# Allegro board SATROT-2-10.brd
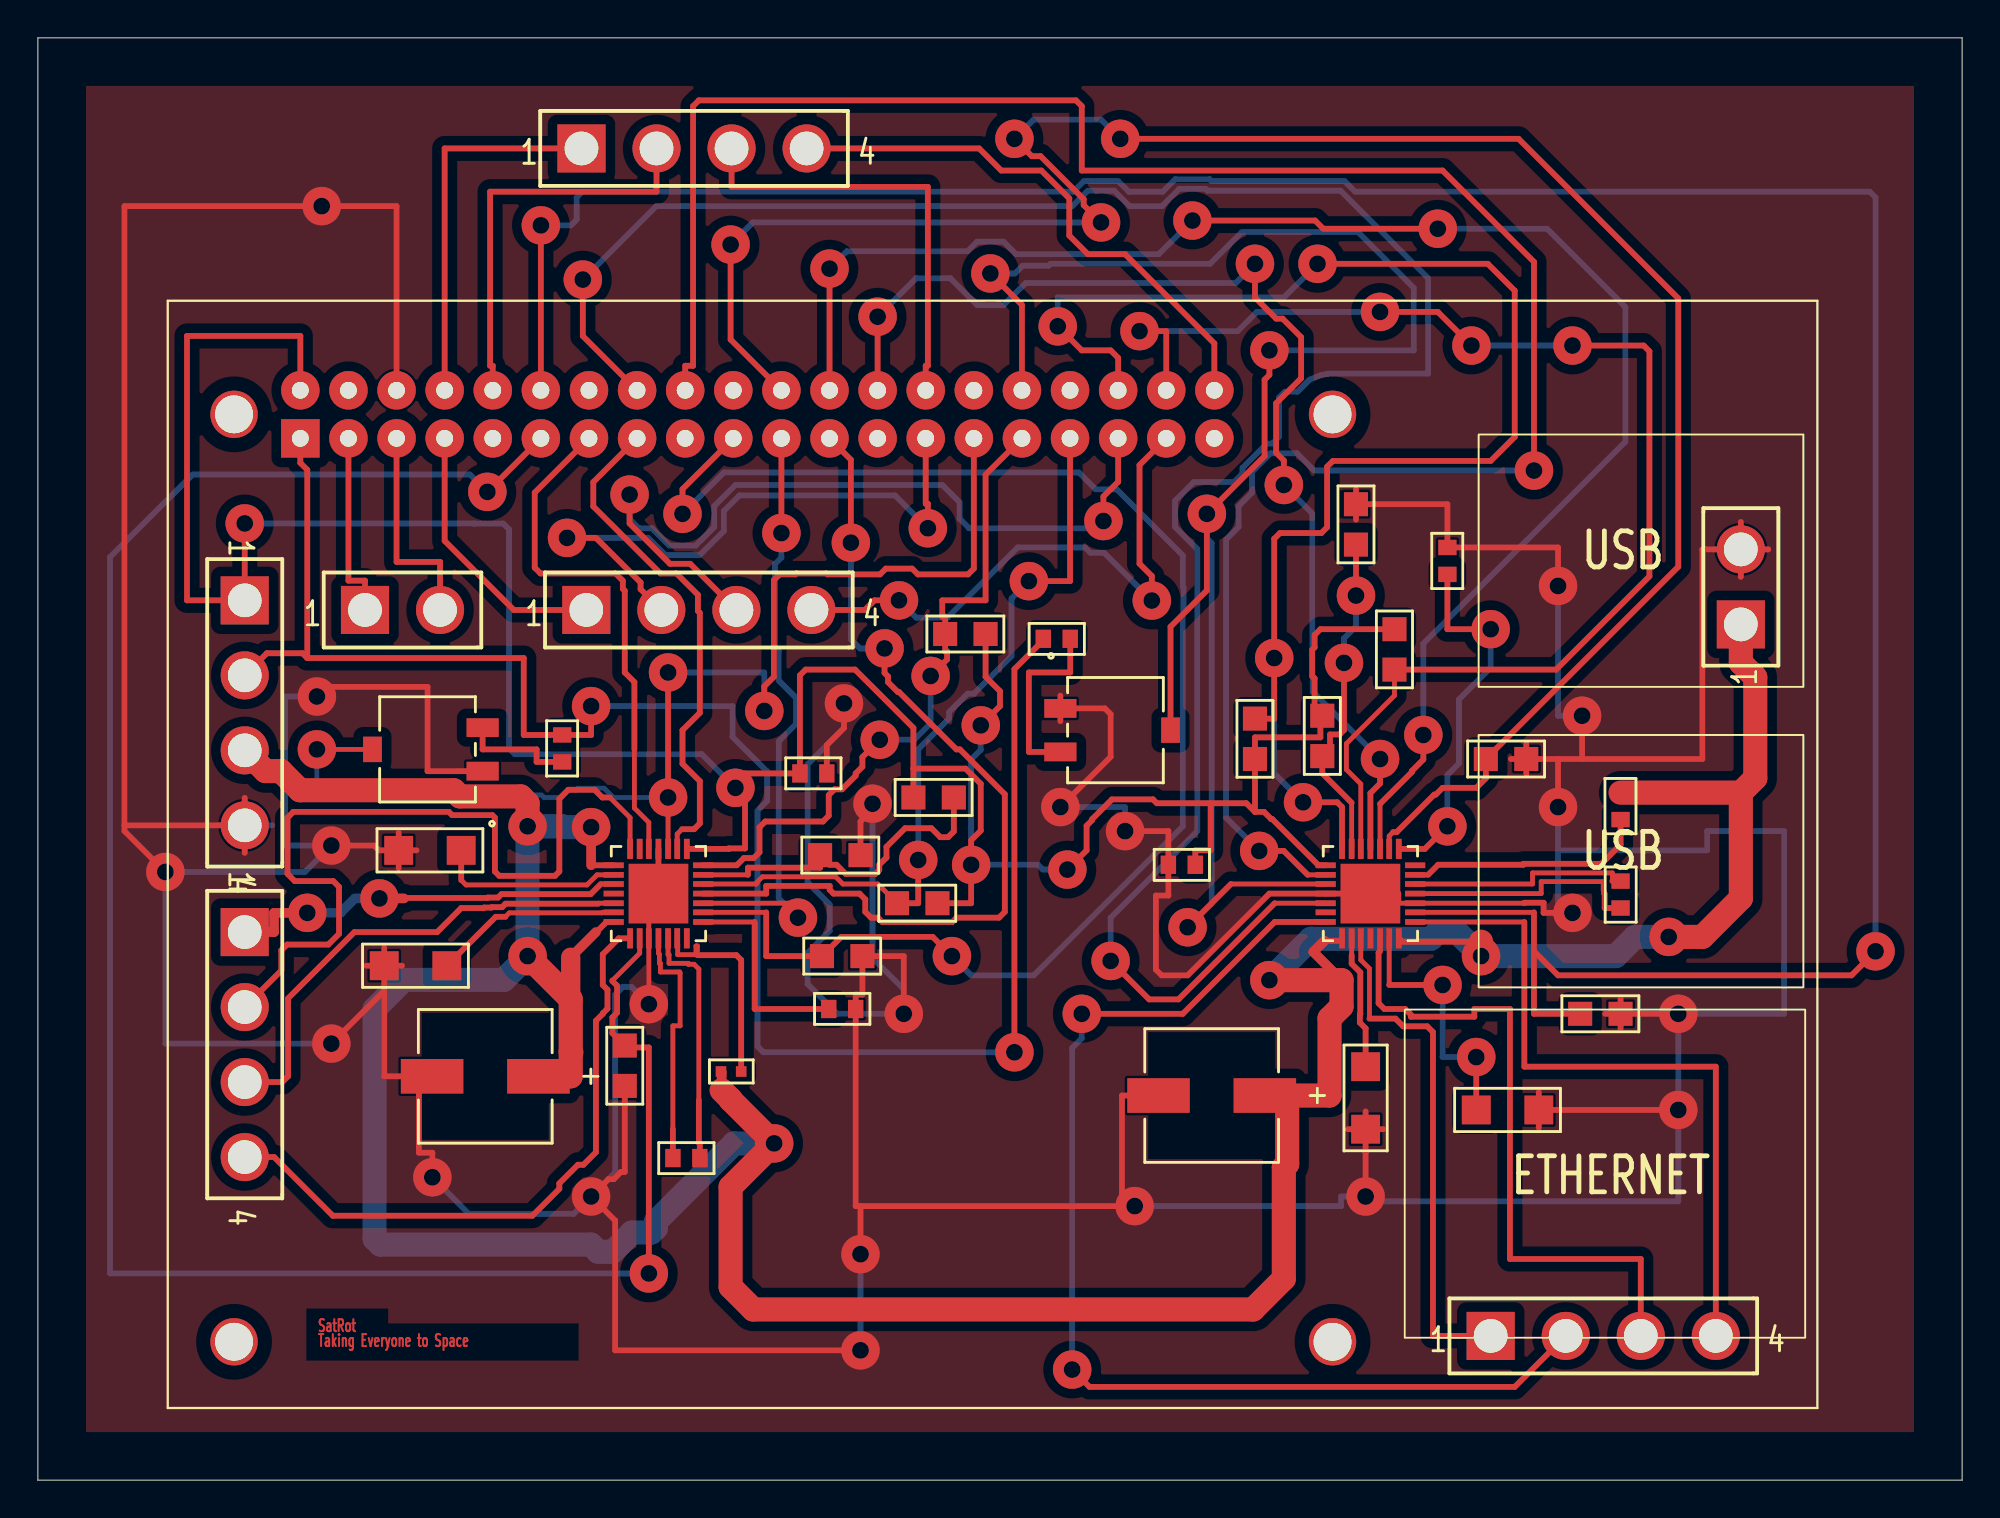
[diagram p0: board, top side]
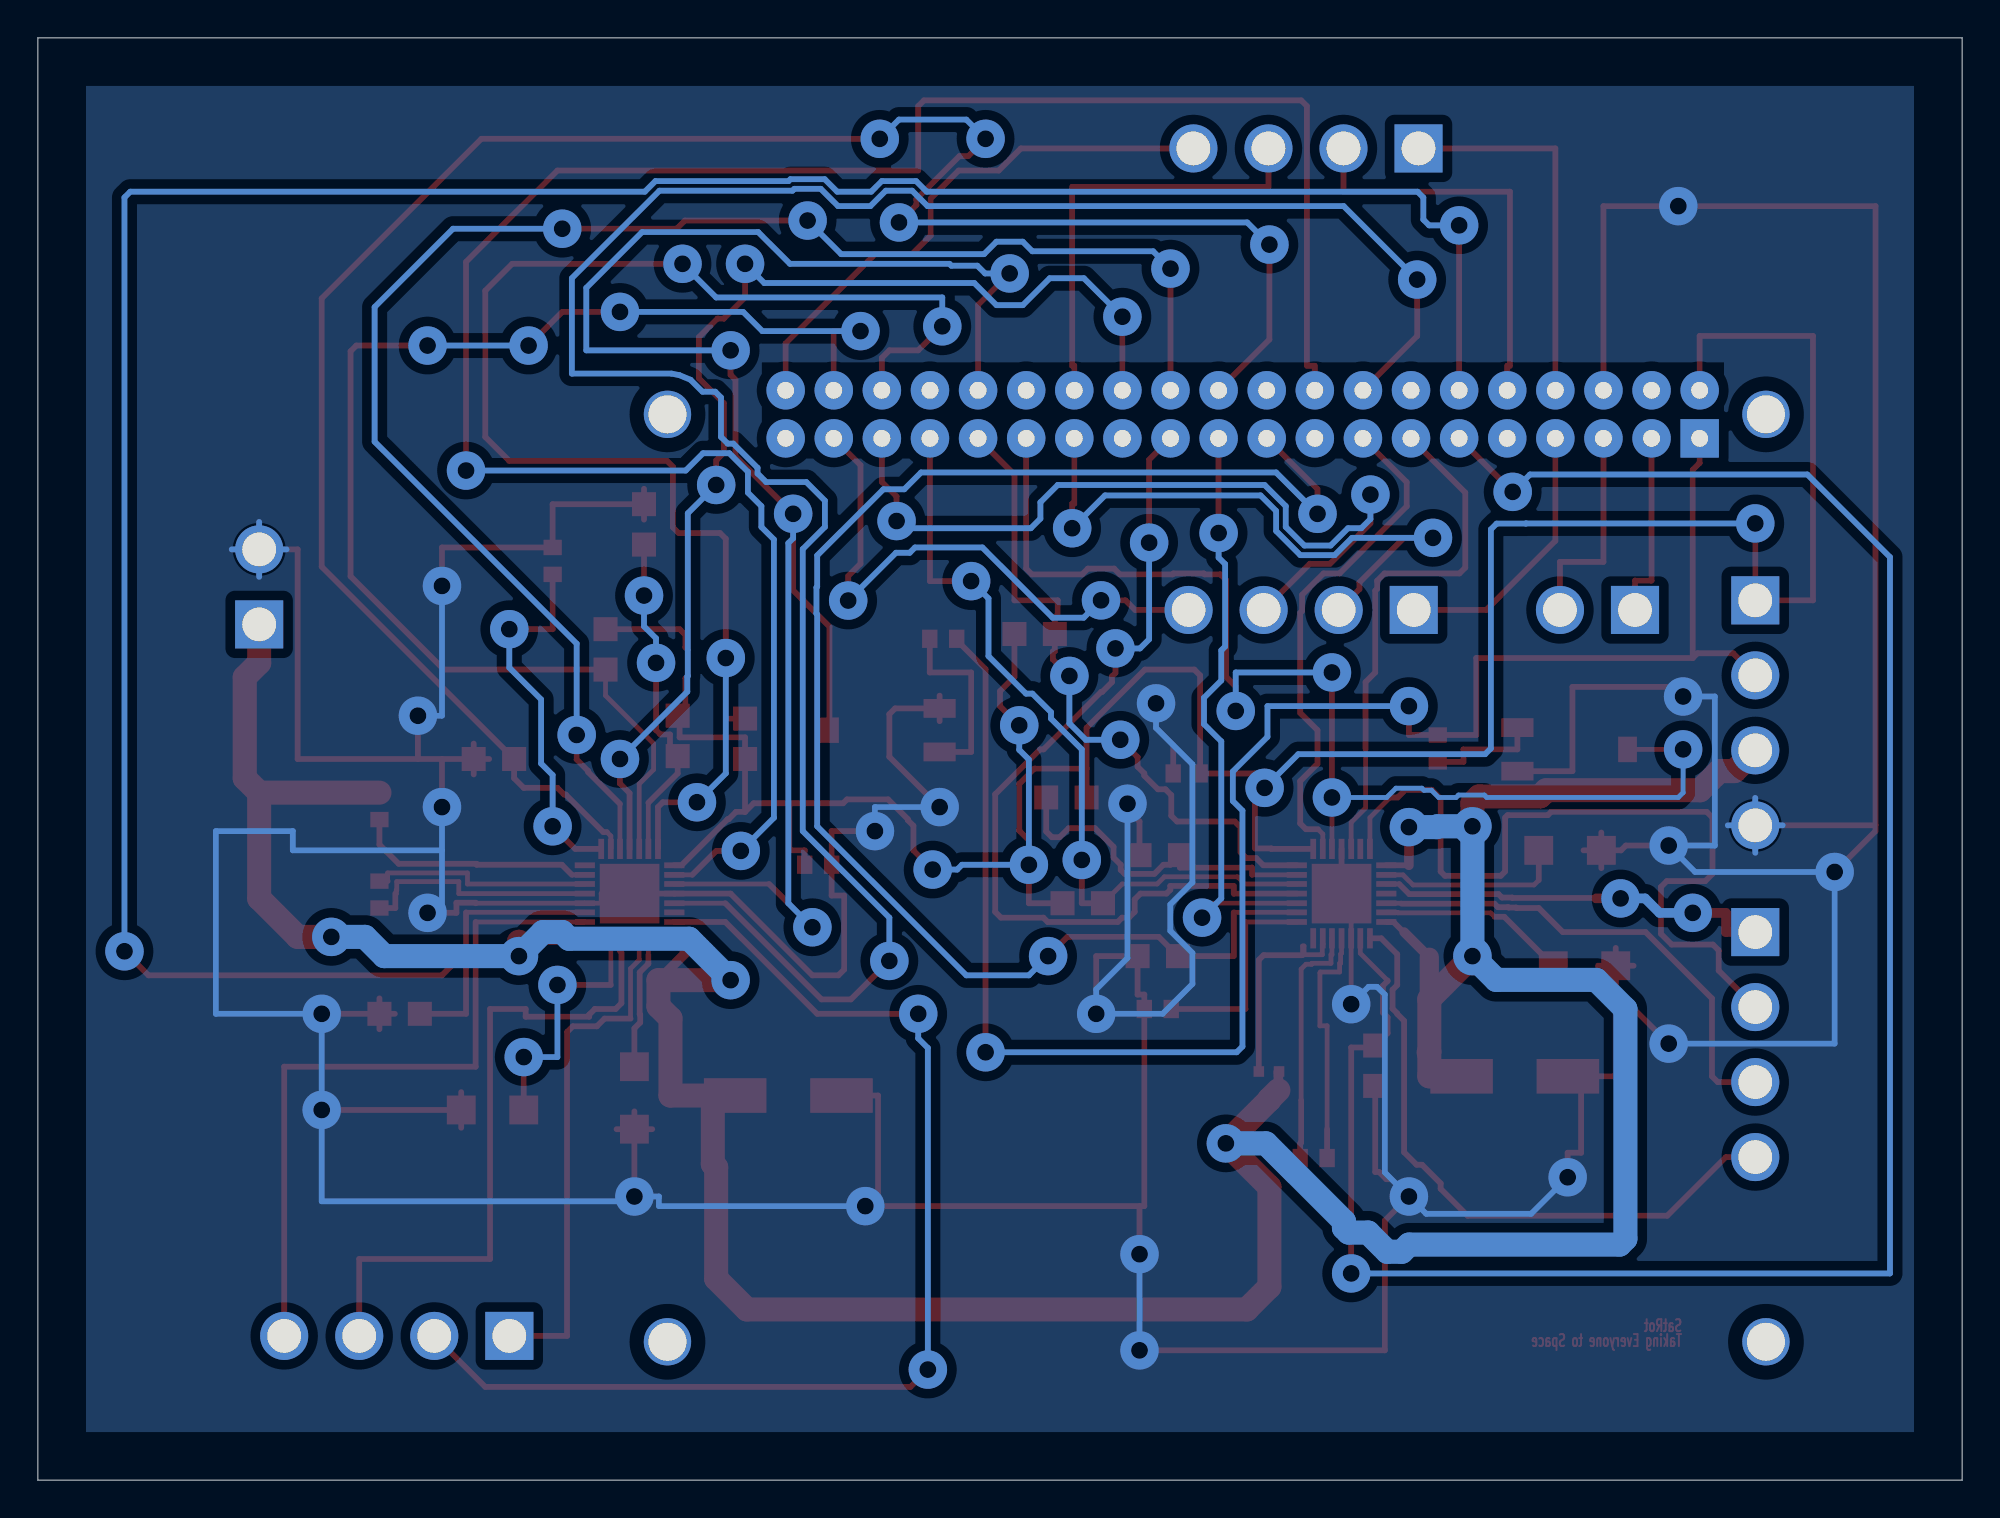
[diagram p1: board, bottom side, seen from below]

Outline 101.6 x 76.2 mm; copper layers: TOP, BOTTOM. Coordinates in mm from the lower left corner of the outline.
Outline path: 0,76.2 101.6,76.2 101.6,0 0,0 0,76.2

## Design rules (mm)
constraint set DEFAULT: min track width 0.305

## Placement (name value [footprint] x y rotation side)
C1  0.1 uF  [SMC0603]  33.53 17.02 0 top
C2  0.22 uF  [SMC0603]  43.18 24.89 180 top
C3  0.1 uF  [SMC0402]  36.07 21.59 0 top
C4  100 uF  [PCAP_SVP_C6-M]  23.62 21.34 180 top
C5  0.22 uF  [SMC0603]  41.66 37.34 180 top
C6  0.1 uF  [SMC0603]  83.57 30.23 90 top
C7  0.22 uF  [SMC0603]  74.42 49.28 270 top
C8  0.1 uF  [SMC0603]  83.57 36.32 270 top
C9  100 uF  [PCAP_SVP_C6-M]  61.98 20.32 180 top
C10  0.22 uF  [SMC0603]  59.69 32.51 0 top
J2  Az Stepper  [BLKCON156VHTM1SQSW1564]  10.92 28.96 270 top
J3  Motor Power  [BLKCON156VHTM1SQSW1562]  89.92 45.21 90 top
J4  Power Connector  [BLKCON156VHTM1SQSW1564]  10.92 46.48 270 top
J5  El Stepper  [BLKCON156VHTM1SQSW1564]  76.71 7.62 0 top
J6  R_PINs  [BLKCON156VHTM1SQSW1564]  28.7 70.36 0 top
J7  L_PINs  [BLKCON156VHTM1SQSW1564]  28.96 45.97 0 top
J8  I2C  [BLKCON156VHTM1SQSW1562]  17.27 45.97 0 top
R1  10K  [SMR0805]  43.43 33.02 180 top
R2  NP  [SMR0805]  46.23 36.07 0 top
R3  100k  [SMR0805]  47.5 30.48 180 top
R4  100k  [SMR0805]  50.04 44.7 180 top
R5  10K POT  [SOT_10KLFTR]  20.57 38.61 90 top
R6  20K  [SMR0603]  27.69 39.37 270 top
R7  NP  [SMR0805]  41.4 27.69 0 top
R8  100k  [SMR0805]  30.99 20.83 90 top
R9  0.05  [SMR1206]  22.35 33.27 180 top
R10  0.05  [SMR1206]  21.59 27.18 180 top
R11  10K  [SMR0805]  69.6 51.56 270 top
R12  NP  [SMR0805]  67.82 40.39 270 top
R13  100k  [SMR0805]  71.63 44.96 270 top
R14  100k  [SMR0805]  64.26 38.1 90 top
R15  10K POT  [SOT_10KLFTR]  56.9 39.62 270 top
R16  20K  [SMR0603]  53.09 44.45 0 top
R17  NP  [SMR0805]  76.45 38.1 0 top
R18  100k  [SMR0805]  83.57 24.64 180 top
R19  0.05  [SMR1206]  70.1 21.84 270 top
R20  0.05  [SMR1206]  75.95 19.56 0 top
U1  A4988SETTR-T  [QFN50P500X500X100-29N]  32.77 30.99 90 top
U2  A4988SETTR-T  [QFN50P500X500X100-29N]  70.36 30.99 180 top
U3  Raspberry Pi B+  [GU-RASP-PI-3]  6.86 3.81 0 top

## Library data of the parts
C1-C3 C5-C8 C10 = CAP NP
C4 C9 = CAP POL: User Part Number: PN; Tolerance: TOL
J2 J4-J7 = 4 HEADER
J3 = CON2
J8 = HEADER 2
R1-R4 R6-R14 R16-R20 = R
R5 R15 = 23BR10KLFTR: User Part Number: PN; Tolerance: TOL
U1 U2 = A4988SETTR-T
U3 = Raspberry Pi B+

## Footprints (pads in the part's own frame, mm; a bottom-side part is the same pattern mirrored in y, then rotated)
BLKCON156VHTM1SQSW1562
  rect 2.54x2.54 hole 1.778: 1(0,0)
  round 2.54 hole 1.778: 2(3.962,0)
BLKCON156VHTM1SQSW1564
  rect 2.54x2.54 hole 1.778: 1(0,0)
  round 2.54 hole 1.778: 2(3.962,0) 3(7.925,0) 4(11.887,0)
GU-RASP-PI-3
  round 2.5 hole 2 unplated: (3.5,52.5) (3.5,3.5) (61.5,52.5) (61.5,3.5)
  rect 2.032x2.032 hole 0.889: 1(7,51.23)
  round 2.032 hole 0.889: 2(7,53.77) 3(9.54,51.23) 4(9.54,53.77) 5(12.08,51.23) 6(12.08,53.77) 7(14.62,51.23) 8(14.62,53.77) 9(17.16,51.23) 10(17.16,53.77) 11(19.7,51.23) 12(19.7,53.77) 13(22.24,51.23) 14(22.24,53.77) 15(24.78,51.23) 16(24.78,53.77) 17(27.32,51.23) 18(27.32,53.77) 19(29.86,51.23) 20(29.86,53.77) 21(32.4,51.23) 22(32.4,53.77) 23(34.94,51.23) 24(34.94,53.77) 25(37.48,51.23) 26(37.48,53.77) 27(40.02,51.23) 28(40.02,53.77) 29(42.56,51.23) 30(42.56,53.77) 31(45.1,51.23) 32(45.1,53.77) 33(47.64,51.23) 34(47.64,53.77) 35(50.18,51.23) 36(50.18,53.77) 37(52.72,51.23) 38(52.72,53.77) 39(55.26,51.23) 40(55.26,53.77)
PCAP_SVP_C6-M
  rect 3.302x1.829 smd: 1(-2.807,0) 2(2.807,0)
QFN50P500X500X100-29N
  rect 1.067x0.305 smd: 1(-2.362,1.499) 2(-2.362,0.991) 3(-2.362,0.508) 4(-2.362,0) 5(-2.362,-0.508) 6(-2.362,-0.991) 7(-2.362,-1.499) 15(2.362,-1.499) 16(2.362,-0.991) 17(2.362,-0.508) 18(2.362,0) 19(2.362,0.508) 20(2.362,0.991) 21(2.362,1.499)
  rect 0.305x1.067 smd: 8(-1.499,-2.362) 9(-0.991,-2.362) 10(-0.508,-2.362) 11(0,-2.362) 12(0.508,-2.362) 13(0.991,-2.362) 14(1.499,-2.362) 22(1.499,2.362) 23(0.991,2.362) 24(0.508,2.362) 25(0,2.362) 26(-0.508,2.362) 27(-0.991,2.362) 28(-1.499,2.362)
  rect 3.15x3.15 smd: 29(0,0)
SMC0402
  rect 0.559x0.559 smd: 1(0,0) 2(1.067,0)
SMC0603
  rect 0.813x0.965 smd: 1(0,0) 2(1.422,0)
SMR0603
  rect 0.813x0.965 smd: 1(0,0) 2(1.422,0)
SMR0805
  rect 1.27x1.27 smd: 1(0,0) 2(2.134,0)
SMR1206
  rect 1.524x1.524 smd: 1(0,0) 2(3.302,0)
SOT_10KLFTR
  rect 0.991x1.702 smd: 1(-1.15,-2.908) 3(1.15,-2.908)
  rect 1.346x0.991 smd: 2(0,2.908)

## Nets
3V3: J4.2 R6.1 R16.1 U3.1
GND: C2.1 C4.2 C5.1 C7.1 C9.2 C10.1 J3.2 J4.4 R1.1 R5.1 R7.2 R8.1 R9.2 R10.2 R11.1 R15.1 R17.2 R18.1 R19.2 R20.2 U1.3 U1.18 U1.29 U2.3 U2.18 U2.29 U3.6
GND3: U3.14
GND4: U3.20
GND5: U3.25
GND6: U3.30
GND7: U3.34
GND8: U3.39
P3V3: U3.17
P5V: U3.4(P5V#4)
VDD: C5.2 C10.2 J4.1 R2.1 R3.1 R4.1 R12.1 R13.1 R14.1 U1.15 U2.15 U3.2
7/GPIO: J7.1 U3.7
19/GPIO: J7.3 U3.35
27/RESERVED: J7.2 U3.27
28/RESERVED: J6.3 U3.28
37/GPIO: J7.4 U3.37
GPIO: J6.4 U3.40
GPIO/RX: J6.2 U3.10
GPIO/TX: J6.1 U3.8
VMM: C3.1 C4.1 C8.1 C9.1 J3.1 J4.3 U1.22 U1.28 U2.22 U2.28
N00486: J2.1 U1.24
N00488: J2.2 U1.21
N00490: J2.3 U1.26
N00492: J2.4 U1.1
N00665: R1.2 R2.2 U1.13
N00675: R3.2 U1.12 U3.33
N00682: R4.2 U1.14(~SLEEP) U3.31
N00813: R5.3 R6.2
N01051: R5.2 U1.17 U3.29
N01158: R8.2 U1.2 U3.11
N01167: R7.1 U1.9 U3.19
N01261: R10.1 U1.27
N01273: R9.1 U1.23
N01454: C1.1 U1.4
N01461: C1.2 U1.5
N01528: C2.2 U1.8
N01594: C3.2 U1.6
N04587: J5.1 U2.24
N04591: J5.2 U2.21
N04595: J5.3 U2.26
N04599: J5.4 U2.1
N04699: R11.2 R12.2 U2.13
N04707: R13.2 U2.12 U3.38
N04715: R14.2 U2.14(~SLEEP) U3.36
N04789: R15.2 U2.17 U3.32
N04853: R18.2 U2.2 U3.12
N04861: R17.1 U2.9 U3.22
N04909: R20.1 U2.27
N04921: R19.1 U2.23
N04961: C6.1 U2.4
N04969: C6.2 U2.5
N04997: C7.2 U2.8
N05017: C8.2 U2.6
N05607: U1.19 U3.13
N05619: U1.16 U3.15
N05647: U1.10 U3.21
N05659: U1.11 U3.23
N05690: U2.19 U3.16
N05705: U2.16 U3.18
N05729: U2.10 U3.24
N05742: U2.11 U3.26
N09636: J8.1 U3.3
N09640: J8.2 U3.5
N53390: R15.3 R16.2

Pads without a net: U1 7 20 25; U2 7 20 25; U3 9

## Via types
v1: diameter 2.032, hole 0.889, TOP to BOTTOM, 99 vias

## Routing (per net, layer and track width the routed paths; a pad name or vN(x,y) marks a point on that pad's centre or on a via; arc(x,y) is an arc through that point)
3V3: length 98.8
  TOP w0.305: R16.1 53.09,44.37 51.56,42.85 v1(51.56,22.61) ; 14.22,43.43 14.22,53.38 13.86,53.74 U3.1 ; 14.22,43.43 25.65,43.43 25.65,39.37 R6.1 29.21,39.37 v1(29.21,40.89) ; 14.22,43.43 13.97,43.69 12.09,43.69 J4.2
  BOTTOM w0.305: v1(29.21,40.89) 36.68,40.89 36.68,39.27 38.51,37.44 38.51,35.88 38,35.37 38,22.91 38.3,22.61 v1(51.56,22.61)
GND: length 515.4
  TOP w0.254: 71.83,30.48 U2.3 78.49,30.48 ; 32.26,29.51 U1.3 v1(32.26,25.15)
  TOP w0.305: v1(15.49,33.53) 17.75,33.53 18.01,33.27 R9.2 ; 57.24,14.48 57.24,20.32 C9.2 ; 57.24,14.48 v1(57.91,14.48) ; 57.24,14.48 43.43,14.48 ; v1(81.53,40.39) 81.53,38.1 ; 81.53,38.1 80.26,38.1 ; 81.53,38.1 87.88,38.1 87.88,49.17 J3.2 ; 10.92,33.15 J4.4 ; J4.4 4.57,34.59 ; J4.4 10.92,36.04 ; R10.2 19.23,27.18 ; R10.2 17.35,27.18 ; R10.2 18.29,25.86 ; R10.2 18.29,28.12 ; 77.77,38.1 R17.2 ; R17.2 78.59,38.91 ; R17.2 78.59,37.29 ; R17.2 80.26,38.1 ; 78.49,30.48 78.49,30.51 79.5,30.51 79.5,29.97 v1(81.03,29.97) ; R19.2 71.04,18.54 ; R19.2 v1(70.1,14.99) ; R19.2 70.1,19.48 ; R19.2 69.16,18.54 ; 19.05,32.33 R9.2 ; R9.2 19.99,33.27 ; R9.2 19.05,34.21 ; 4.57,34.59 4.57,34.29 v1(6.73,32.13) ; 4.57,34.59 4.57,67.31 v1(14.99,67.31) 18.94,67.31 U3.6 ; J3.2 91.36,49.17 ; J3.2 89.92,47.73 ; J3.2 89.92,50.62 ; R15.1 53.99,41.45 ; R15.1 53.99,40.1 ; R15.1 56.34,40.77 56.64,40.47 56.64,38.21 v1(53.99,35.56) ; 83.57,23.82 R18.1 ; R18.1 82.75,24.64 ; R18.1 83.57,25.45 ; R18.1 v1(86.61,24.64) ; v1(20.83,16) 20.83,17.3 20.12,17.3 20.12,21.34 ; v1(14.73,41.4) 14.73,41.91 20.57,41.91 20.57,37.46 R5.1 ; 79.25,18.62 R20.2 ; R20.2 79.25,20.5 ; R20.2 v1(86.61,19.56) ; v1(43.43,11.94) 43.43,14.48 ; 43.43,14.48 43.18,14.48 C2.1 43.18,25.65 43.54,25.65 R7.2 45.72,27.69 v1(45.72,24.64) ; v1(80.26,47.24) 80.26,49.28 C7.1 74.42,51.56 R11.1 ; 71.83,30.48 71.83,30.99 U2.29 U2.18 65.02,30.99 60.71,26.67 59.33,26.67 59.03,26.97 59.03,30.89 59.69,30.89 C10.1 59.69,34.29 v1(57.4,34.29) ; 18.29,25.86 18.29,21.34 20.12,21.34 ; 18.29,25.86 v1(15.49,23.06) ; 80.26,38.1 v1(80.26,35.56) ; R11.1 69.6,50.75 ; R11.1 69.6,52.38 ; U1.18 U1.29 32.77,30.02 32.26,29.51 ; 20.12,21.34 C4.2 ; R1.1 43.43,34.8 44.07,35.43 v1(44.07,35.74) ; v1(43.43,6.86) 30.48,6.86 30.48,13.72 v1(29.21,14.99) 30.13,15.9 30.41,15.9 30.78,16.28 30.99,16.28 R8.1 ; C5.1 41.66,38.84 42.56,39.74 v1(42.56,41.04)
  BOTTOM w0.305: v1(15.49,23.06) 6.73,23.06 v1(6.73,32.13) 14.1,32.13 v1(15.49,33.53) 13.06,33.53 13.06,41.4 v1(14.73,41.4) ; v1(80.26,47.24) 80.26,40.39 v1(81.53,40.39) ; v1(43.43,6.86) v1(43.43,11.94) ; J3.2 89.92,50.62 ; J3.2 91.36,49.17 ; J3.2 88.47,49.17 ; J3.2 89.92,47.73 ; v1(57.91,14.48) 68.81,14.48 68.81,14.99 v1(70.1,14.99) 70.1,14.73 86.61,14.73 v1(86.61,19.56) v1(86.61,24.64) 92.2,24.64 92.2,34.29 88.14,34.29 88.14,33.27 80.26,33.27 ; v1(44.07,35.74) 44.07,27.58 45.72,25.93 v1(45.72,24.64) 42.21,24.64 40.64,26.21 40.64,27.85 41.81,29.02 41.81,30.41 40.64,31.58 40.64,37.82 42.56,39.74 v1(42.56,41.04) ; 80.26,33.27 80.26,29.97 v1(81.03,29.97) ; 80.26,33.27 v1(80.26,35.56) ; v1(32.26,25.15) 31.34,26.06 30.89,26.06 30.48,25.65 30.48,16.26 v1(29.21,14.99) 28.29,14.07 22.76,14.07 v1(20.83,16) ; J4.4 10.92,36.04 ; J4.4 9.47,34.59 ; J4.4 12.37,34.59 ; J4.4 10.92,33.15 ; v1(57.4,34.29) 57.4,35.56 v1(53.99,35.56)
VDD: length 164.6
  TOP w0.305: 64.26,35.31 R14.1 64.26,39.24 67.72,39.24 67.72,40.39 ; 64.26,35.31 64.74,35.31 65.13,34.92 65.18,34.92 67.61,32.49 U2.15 ; 64.26,35.31 63.8,35.76 61.92,35.76 ; 37.34,36.58 37.34,33.38 36.47,33.38 36.47,33.35 U1.15 ; 37.34,36.58 v1(36.83,36.58) ; 37.34,36.58 37.34,37.34 C5.2 40.23,42.52 40.54,42.82 43.15,42.82 46.23,39.74 46.23,37.59 ; 61.92,35.76 59.08,35.76 58.88,35.97 56.71,35.97 55.66,34.92 55.66,34.87 55.37,34.57 55.37,33.27 v1(54.36,32.26) ; 61.92,35.76 61.92,33.27 61.11,33.27 C10.2 ; R12.1 67.72,40.39 ; 67.72,40.39 67.41,40.69 67.41,42.36 67.28,42.49 67.28,43.87 67.41,44 67.41,44.65 67.72,44.96 R13.1 ; U3.2 13.86,60.45 7.87,60.45 7.87,46.48 J4.1 v1(10.92,50.55) ; R4.1 50.04,42.44 50.8,41.68 50.8,40.89 v1(49.78,39.88) ; 46.23,37.59 R2.1 ; 46.23,37.59 48.98,37.59 49.78,36.79 49.78,34.32 49.28,33.81 v1(49.28,32.51) 49.28,30.48 R3.1
  BOTTOM w0.305: v1(36.83,36.58) 35.05,38.35 25.19,38.35 24.88,38.66 24.88,50.23 24.58,50.54 23.04,50.54 23.03,50.55 v1(10.92,50.55) ; v1(54.36,32.26) 53.06,32.26 52.81,32.51 v1(49.28,32.51) 49.28,38.07 49.78,38.58 v1(49.78,39.88)
7/GPIO: length 14.4
  TOP w0.305: J7.1 25.13,45.97 21.48,49.63 U3.7
19/GPIO: length 44.2
  TOP w0.305: v1(31.24,52.07) 31.24,50.55 33.38,48.41 34.44,48.41 J7.3 ; U3.35 57.04,52.75 56.26,51.97 v1(56.26,50.67)
  BOTTOM w0.305: v1(31.24,52.07) 31.24,50.77 31.72,50.29 32.43,50.29 33.34,49.38 34.73,49.38 35.71,50.36 35.71,51.46 36.83,52.58 47.75,52.58 48.67,51.66 48.67,50.8 49.17,50.29 55.88,50.29 v1(56.26,50.67)
27/RESERVED: length 33.7
  TOP w0.305: U3.27 46.88,51.59 46.99,51.59 v1(46.99,50.29) ; v1(27.94,49.78) 29.46,49.78 31.82,47.43 31.82,47.07 J7.2
  BOTTOM w0.305: v1(46.99,50.29) 45.26,52.02 37.04,52.02 36.22,51.21 36.22,50.15 34.94,48.87 33.13,48.87 32.22,49.78 v1(27.94,49.78)
28/RESERVED: length 23.3
  TOP w0.305: U3.28 46.88,58.88 46.99,58.88 46.99,68.33 36.63,68.33 J6.3
37/GPIO: length 30.7
  TOP w0.305: U3.37 58.17,53.63 58.17,48.42 58.82,47.77 v1(58.82,46.47) ; J7.4 43.66,45.97 44.17,46.48 v1(45.47,46.48)
  BOTTOM w0.305: v1(58.82,46.47) 56.29,49 55.57,49 55.29,49.28 51.73,49.28 48.02,45.57 46.38,45.57 v1(45.47,46.48)
GPIO: length 29.4
  TOP w0.305: J6.4 49.7,70.36 50.87,69.19 52.98,69.19 54.46,67.72 54.46,65.75 55.44,64.77 57.4,64.77 62.12,60.06 U3.40
GPIO/RX: length 21.7
  TOP w0.305: J6.2 32.66,68.07 23.88,68.07 23.88,58.88 24.02,58.88 U3.10
GPIO/TX: length 20
  TOP w0.305: U3.8 21.48,70.36 J6.1
VMM: length 216.4
  TOP w0.305: U1.22 29.21,32.49 ; U2.28 72.03,28.45 76.2,28.45 ; U1.28 30.02,29.49 29.49,28.96 29.46,28.96 ; U2.22 68.86,28.5 67.93,28.5
  TOP w0.508: 36.1,20.6 36.1,21.56 C3.1 ; 29.46,28.96 28.13,27.63 ; 29.21,32.49 v1(29.21,34.5) ; 68.83,26.42 67.34,27.91 67.93,28.5
  TOP w1.016: 28.13,27.63 28.13,25.41
  TOP w1.27: 65.96,20.32 65.48,20.32 ; 65.96,20.32 65.96,16.7 65.79,16.53 65.79,10.64 64.16,9.02 37.77,9.02 36.58,10.21 36.58,15.49 v1(38.87,17.79) 36.58,20.09 36.58,20.12 36.1,20.6 ; 65.96,20.32 68.2,20.32 68.2,24.4 68.83,25.03 68.83,26.42 v1(65.02,26.42) ; 65.48,20.32 C9.1 ; 65.48,20.32 65.48,20.1 ; J3.1 89.92,43.18 90.68,42.42 90.68,37.08 89.92,36.32 ; 27.13,21.56 27.13,21.34 ; 27.13,21.34 C4.1 ; 27.13,21.34 28.13,21.34 28.13,22.63 ; 89.92,36.32 89.92,30.73 87.88,28.7 v1(86.11,28.7) ; 89.92,36.32 C8.1 ; v1(25.86,34.54) 25.86,35.76 25.5,36.12 22.28,36.12 21.96,36.45 13.84,36.45 12.82,37.46 12.02,37.46 J4.3 ; 28.13,22.63 28.17,22.6 ; 28.13,22.63 28.13,25.41 v1(25.86,27.69) ; v1(76.2,27.69) 76.2,28.45
  BOTTOM w1.27: v1(65.02,26.42) 67.21,28.6 73.55,28.6 73.91,28.96 74.93,28.96 v1(76.2,27.69) 83.31,27.69 84.33,28.7 v1(86.11,28.7) ; v1(29.21,34.5) 27.76,34.5 27.71,34.54 v1(25.86,34.54) v1(25.86,27.69) 24.6,26.43 19.32,26.43 17.78,24.89 17.78,12.75 18.08,12.45 29.2,12.45 29.59,12.06 30.35,12.06 31.36,13.08 32.39,13.08 32.64,13.33 32.64,13.67 36.76,17.79 v1(38.87,17.79)
N00486: length 21.1
  TOP w0.254: 29.72,31.5 U1.24
  TOP w0.305: 29.72,31.5 29.19,30.96 24.48,30.96 24.3,30.78 23.75,30.78 23.73,30.76 19.35,30.76 19.33,30.73
  TOP w0.508: J2.1 12.47,28.96 12.47,29.97 v1(14.22,29.97) ; v1(18.03,30.73) 19.33,30.73
  BOTTOM w0.508: v1(18.03,30.73) 16.74,30.73 15.98,29.97 v1(14.22,29.97)
N00488: length 43.3
  TOP w0.254: 30.2,36.07 31.27,35 U1.21
  TOP w0.305: 30.2,36.07 29.8,36.07 29.4,36.47 28.01,36.47 27.53,36 27.53,32.16 27.3,31.93 24.36,31.93 24.13,32.16 24.13,35 24,35.13 21.87,35.13 21.7,35.31 13.49,35.31 13.18,35 13.18,32.03 13.56,31.65 15.6,31.65 15.9,31.34 15.9,28.86 15.33,28.3 13.16,28.3 12.85,27.99 12.85,26.92 J2.2
N00490: length 25.8
  TOP w0.254: 29.59,30.45 29.62,30.48 U1.26
  TOP w0.305: J2.3 12.9,21.03 13.21,21.34 13.21,25.45 16.71,28.96 21.08,28.96 22.35,30.23 23.53,30.23 23.55,30.25 23.94,30.25 23.97,30.27 24.51,30.27 24.69,30.45 29.59,30.45
N00492: length 34
  TOP w0.305: J2.4 12.47,17.07 15.57,13.97 26.11,13.97 27.53,15.39 27.53,15.68 28.52,16.66 28.8,16.66 29.46,17.32 29.46,24.27 29.83,24.63 29.83,24.66 30.07,24.91 30.07,25.91 29.83,26.16 29.83,27.78 30.67,28.63 U1.1
N00665: length 18.3
  TOP w0.254: 37.49,31.98 U1.13
  TOP w0.305: R2.2 48.36,34.27 48.06,33.97 47.65,33.97 47.18,34.44 45.79,34.44 44.81,33.46 44.81,32.89 44.42,32.51 44.42,32.24 44.22,32.03 42.65,32.03 42.17,32.51 41.81,32.51 R1.2 41.3,32.36 37.49,32.36 37.49,31.98
N00675: length 41.5
  TOP w0.254: U1.12 37.92,31.5 37.97,31.55 37.97,31.59 38.26,31.88 42.12,31.88 42.5,31.5 44.35,31.5 R3.2
  TOP w0.305: R3.2 46.48,30.48 v1(46.48,32.77) ; U3.33 54.5,47.5 v1(52.32,47.5)
  BOTTOM w0.305: v1(46.48,32.77) 46.48,38.61 48.11,40.23 48.11,40.57 49.09,41.55 49.43,41.55 51.41,43.53 51.41,46.58 v1(52.32,47.5)
N00682: length 35.6
  TOP w0.305: v1(44.45,39.12) 43.53,38.2 43.53,37.69 43.18,37.34 43.18,37.22 42.46,36.5 42.06,36.5 41.76,36.2 41.76,35.1 41.45,34.8 38.4,34.8 38.1,34.49 38.1,33.17 37.8,32.87 37.28,32.87 36.9,32.49 U1.14 ; v1(47.14,42.49) 48.01,43.36 48.01,43.79 47.9,43.79 R4.2 47.9,45.62 47.75,45.62 47.75,46.48 50.04,46.48 50.04,53.12 U3.31
  BOTTOM w0.305: v1(44.45,39.12) 46.27,39.12 47.14,39.98 v1(47.14,42.49)
N00813: length 6
  TOP w0.305: R6.2 26.33,37.95 26.33,38.61 23.48,38.61 R5.3
N01051: length 65.9
  TOP w0.254: v1(33.27,36.07) U1.17 ; v1(14.73,38.61) R5.2
  TOP w0.305: v1(33.27,42.67) v1(33.27,36.07) ; U3.29 49.42,48.16 49.11,47.85 46.47,47.85 46.16,48.16 44.77,48.16 44.47,47.85 41.69,47.85 41.64,47.9 40.04,47.9 39.99,47.85 39.17,47.85 38.86,47.55 38.86,42.44 38.35,41.94 v1(38.35,40.64)
  BOTTOM w0.254: v1(33.27,36.07) 30.38,36.07 29.89,36.56 28.53,36.56 28.42,36.45 28.02,36.45 27.64,36.07 26.72,36.07 26.59,36.2 25.22,36.2 25.1,36.07 14.99,36.07 14.73,36.32 v1(14.73,38.61)
  BOTTOM w0.305: v1(33.27,42.67) 38.35,42.67 v1(38.35,40.64)
N01158: length 112.4
  TOP w0.254: U1.2 31.78,27.84 30.33,26.4
  TOP w0.305: v1(32.26,10.92) 32.26,22.86 31.09,22.86 R8.2 30.33,23.61 30.33,24.45 30.58,24.7 30.58,26.12 30.33,26.37 30.33,26.4 ; U3.11 v1(23.73,52.21)
  BOTTOM w0.305: v1(32.26,10.92) 3.81,10.92 3.81,48.77 8.17,53.13 22.82,53.13 v1(23.73,52.21)
N01167: length 80.7
  TOP w0.254: U1.9 38.46,30
  TOP w0.305: v1(48.26,27.69) 47.24,28.7 42.42,28.7 R7.1 38.46,27.69 38.46,30 ; v1(34.04,51.05) 34.04,52.36 U3.19
  BOTTOM w0.305: v1(48.26,27.69) 49.28,26.67 52.58,26.67 60.45,34.54 60.45,45.74 60.49,45.78 60.49,47.17 60.45,47.21 60.45,48.85 56.96,52.35 55.85,52.35 54.97,53.24 36.22,53.24 v1(34.04,51.05)
N01261: length 10
  TOP w0.254: U1.27 29.81,30 29.79,29.97 24.89,29.97 24.68,29.76
  TOP w0.305: R10.1 24.18,29.76 24.68,29.76
N01273: length 10
  TOP w0.254: U1.23 29.52,31.98 28.99,31.45 22.61,31.45 22.35,31.7
  TOP w0.305: R9.1 22.35,31.7
N01454: length 13.1
  TOP w0.254: 33.53,18.54 33.53,24 33.91,24 33.91,26.8 33.88,26.8 33.88,26.85 32.87,26.85 32.87,27.3 32.82,27.3 32.82,27.79 32.77,27.84 U1.4
  TOP w0.305: C1.1 33.53,18.54
N01461: length 13.1
  TOP w0.254: U1.5 33.27,27.76 33.32,27.76 33.32,27.3 34.34,27.3 34.34,27.25 34.65,27.25 34.9,27 34.9,20.07
  TOP w0.305: 34.9,20.07 34.9,17.83 34.95,17.78 C1.2
N01528: length 11.2
  TOP w0.254: U1.8 37.85,29.49
  TOP w0.305: 37.85,29.49 37.85,24.89 C2.2
N01594: length 11.2
  TOP w0.254: 34.82,27.74 34.82,28.22 34.75,28.22 34.75,27.76 33.78,27.76 33.78,28.29 33.76,28.32 U1.6
  TOP w0.305: C3.2 37.13,27.48 36.88,27.74 34.82,27.74
N04587: length 27.2
  TOP w0.254: 70.31,24.38 70.31,27.03 69.85,27.48 U2.24
  TOP w0.305: 70.31,24.38 71.68,24.38 72.09,23.98 73.36,23.98 73.66,23.67 73.66,7.62 J5.1
N04591: length 61.4
  TOP w0.305: U2.21 65.3,29.49 60.45,24.64 v1(55.12,24.64) ; J5.2 77.98,4.93 55.53,4.93 v1(54.61,5.84)
  BOTTOM w0.305: v1(55.12,24.64) 55.12,23.34 54.61,22.83 v1(54.61,5.84)
N04595: length 35.3
  TOP w0.254: 70.87,27.95 U2.26
  TOP w0.305: 70.87,27.95 70.79,27.87 70.79,25.2 71.09,24.89 72.19,24.89 72.49,24.59 72.49,24.49 75.84,24.49 75.84,24.89 77.72,24.89 77.72,11.68 84.63,11.68 J5.3
N04599: length 37.7
  TOP w0.254: 78.49,29.49 U2.1
  TOP w0.305: 78.49,29.49 78.49,21.84 88.6,21.84 J5.4
N04699: length 18
  TOP w0.254: U2.13 69.37,35.79
  TOP w0.305: R11.2 v1(69.6,46.74) ; v1(68.96,43.18) 68.96,39.63 68.73,39.4 68.22,39.4 68.22,38.25 R12.2 67.82,37.34 69.37,35.79
  BOTTOM w0.305: v1(69.6,46.74) 69.6,45.11 68.96,44.48 v1(68.96,43.18)
N04707: length 71
  TOP w0.254: U2.12 69.85,36.78 69.09,37.54 69.09,38.91 71.63,41.45 R13.2
  TOP w0.305: v1(75.69,59.94) 73.91,61.72 v1(70.87,61.72) ; v1(81.03,59.94) 84.79,59.94 85.09,59.64 85.09,47.75 80.16,42.82 R13.2 ; v1(58.17,60.71) 59.58,60.71 U3.38
  BOTTOM w0.305: v1(58.17,60.71) 63.35,60.71 64.36,61.72 v1(70.87,61.72) ; v1(75.69,59.94) v1(81.03,59.94)
N04715: length 80.2
  TOP w0.305: v1(53.85,60.96) 55.12,59.69 56.64,59.69 57.04,59.29 U3.36 ; v1(66.8,35.81) 68.61,35.81 68.86,35.56 U2.14 ; v1(67.56,64.26) 76.56,64.26 77.98,62.84 77.98,55.12 76.71,53.85 68.38,53.85 68.07,53.54 68.07,50.34 67.77,50.04 65.58,50.04 65.28,49.73 v1(65.28,43.43) 65.28,40.23 R14.2
  BOTTOM w0.305: v1(53.85,60.96) 53.85,62.48 65.79,62.48 v1(67.56,64.26) ; v1(65.28,43.43) 65.28,37.34 v1(66.8,35.81)
N04789: length 95.2
  TOP w0.254: U2.17 62.99,31.5
  TOP w0.305: v1(65.02,59.69) 65.02,58.39 64.77,58.14 64.77,54.1 v1(61.72,51.05) 61.72,47.01 59.8,45.09 R15.2 ; v1(50.29,63.75) 51.96,62.09 U3.32 ; 62.99,31.5 v1(60.71,29.21)
  BOTTOM w0.305: v1(60.71,29.21) 61.98,30.48 61.98,49.5 61.72,49.76 v1(61.72,51.05) ; v1(50.29,63.75) 51.59,63.75 52,64.16 53.37,64.16 53.47,64.26 61.89,64.26 63.57,65.94 69.7,65.94 72.64,62.99 72.64,59.69 v1(65.02,59.69)
N04853: length 154.7
  TOP w0.254: U2.2 78.99,30
  TOP w0.305: U3.12 v1(26.56,66.29) ; v1(97.03,27.94) 95.76,26.67 80.26,26.67 78.99,27.94 ; 78.99,27.94 78.99,30 ; 78.99,27.94 78.99,24.64 R18.2
  BOTTOM w0.305: v1(97.03,27.94) 97.03,67.77 96.72,68.07 69.55,68.07 68.99,68.63 61.97,68.63 61.87,68.73 60.05,68.73 59.39,68.07 57.6,68.07 57.04,68.63 55.23,68.63 54.67,68.07 28.75,68.07 28.45,67.77 28.45,66.6 28.14,66.29 v1(26.56,66.29)
N04861: length 111.4
  TOP w0.254: 71.56,34.24 71.35,34.03 U2.9
  TOP w0.305: v1(57.15,70.87) 78.18,70.87 86.61,62.43 86.61,48.26 R17.1 76.45,37.08 75.95,36.58 74.17,36.58 73.81,36.22 73.73,36.22 71.75,34.24 71.56,34.24 ; v1(56.13,66.45) 55.22,67.36 55.22,67.67 52.94,69.95 52.48,69.95 v1(51.56,70.87) ; U3.22 36.58,60.26 v1(36.58,65.28)
  BOTTOM w0.305: v1(51.56,70.87) 52.58,71.88 56.13,71.88 v1(57.15,70.87) ; v1(56.13,66.45) 37.75,66.45 v1(36.58,65.28)
N04909: length 13.7
  TOP w0.254: U2.27 71.35,26.16
  TOP w0.305: R20.1 v1(75.95,22.35) ; 71.35,26.16 v1(74.17,26.16)
  BOTTOM w0.305: v1(74.17,26.16) 74.17,22.35 v1(75.95,22.35)
N04921: length 7.1
  TOP w0.254: U2.23 69.37,27.74
  TOP w0.305: 69.37,27.74 69.37,27.28 69.82,26.83 69.82,24.62 69.8,24.59 69.8,24.17 70.1,23.87 R19.1
N04961: length 12.9
  TOP w0.254: 82.73,30.99 82.68,30.99 82.68,31.17 82.65,31.17 82.65,31.62 79.38,31.62 79.38,30.99 U2.4
  TOP w0.305: 82.73,30.99 82.73,30.23 C6.1
N04969: length 11.9
  TOP w0.254: U2.5 78.92,31.5 78.92,32.08 83.13,32.08 83.13,31.65
  TOP w0.305: 83.13,31.65 C6.2
N04997: length 19.6
  TOP w0.305: C7.2 74.42,44.96 v1(76.71,44.96) ; v1(74.42,34.54) 73.23,33.35 U2.8
  BOTTOM w0.305: v1(76.71,44.96) 76.71,42.93 75.03,41.25 75.03,37.86 74.42,37.25 v1(74.42,34.54)
N05017: length 12.9
  TOP w0.254: 73.4,31.98 U2.6
  TOP w0.305: 73.4,31.98 73.93,32.51 78.44,32.51 78.44,32.56 82.55,32.56 83.57,33.58 C8.2
N05607: length 27.7
  TOP w0.254: U1.19 32.26,34.75 31.5,35.51 31.5,38.61
  TOP w0.305: 31.5,38.61 31.5,42.16 30.99,42.67 30.99,46.99 30.89,47.09 30.89,47.52 30.5,47.9 26.54,47.9 26.23,48.21 26.23,52.18 U3.13
N05619: length 27.1
  TOP w0.254: 34.01,34.39 33.76,34.14 U1.16
  TOP w0.305: U3.15 29.33,52.73 29.33,51.45 32.87,47.9 33.72,47.9 34.85,46.77 34.85,45.92 34.95,45.82 34.95,40.54 34.04,39.62 34.04,37.85 34.95,36.93 34.95,34.7 34.65,34.39 34.01,34.39
N05647: length 32.5
  TOP w0.254: U1.10 40.13,30.48
  TOP w0.305: 40.13,30.48 v1(40.13,29.72) ; U3.21 v1(39.26,50.04)
  BOTTOM w0.305: v1(40.13,29.72) 39.12,30.73 39.12,39.03 40.03,39.95 40.03,41.33 39.12,42.25 39.12,43.84 38.91,44.04 38.91,48.4 39.26,48.74 v1(39.26,50.04)
N05659: length 47.6
  TOP w0.305: U1.11 38.46,30.99 38.46,31.39 41.81,31.39 41.81,31.19 42.01,30.99 43.38,30.99 43.69,30.68 43.69,30.02 43.99,29.72 44.35,29.72 44.58,29.49 48.28,29.49 48.51,29.72 50.75,29.72 51.05,30.02 51.05,36.24 48.68,38.61 48.5,38.61 45.46,41.65 45.4,41.65 44.89,42.16 44.89,42.46 44.7,42.65 v1(44.7,43.94) ; v1(42.93,49.53) 42.93,53.91 U3.23
  BOTTOM w0.305: v1(44.7,43.94) 43.41,43.94 42.93,44.42 v1(42.93,49.53)
N05690: length 119.8
  TOP w0.254: U2.19 65.3,30.48
  TOP w0.305: U3.16 28.77,60.44 v1(28.77,63.43) ; v1(56.64,27.43) 58.67,25.4 60.22,25.4 65.3,30.48
  BOTTOM w0.305: v1(56.64,27.43) 56.64,29.72 61.21,34.29 61.21,49.19 60.05,50.36 60.05,51.75 61.03,52.73 63.14,52.73 63.6,53.19 63.6,53.48 64.88,54.76 65.18,54.76 65.53,55.12 65.53,57.2 65.84,57.51 66.51,57.51 67.14,58.14 67.73,58.38 68.15,58.46 73.41,58.46 73.41,63.5 68.78,68.12 61.75,68.12 61.65,68.22 60.27,68.22 59.35,67.31 57.64,67.31 56.83,68.12 55.44,68.12 54.62,67.31 32.65,67.31 v1(28.77,63.43)
N05705: length 117.5
  TOP w0.254: U2.16 67.05,31.98
  TOP w0.305: U3.18 34.18,58.88 34.59,58.88 34.59,72.59 34.9,72.9 54.81,72.9 55.12,72.59 55.12,69.19 74.17,69.19 78.99,64.36 v1(78.99,53.34) ; 67.05,31.98 65.78,33.24 v1(64.49,33.24)
  BOTTOM w0.305: v1(78.99,53.34) 67.4,53.34 66.48,54.25 65.09,54.25 64.11,53.27 64.11,52.17 63.4,51.46 63.4,50.36 62.74,49.7 62.74,34.99 v1(64.49,33.24)
N05729: length 85.9
  TOP w0.254: U2.10 70.87,35.73
  TOP w0.305: v1(73.15,39.37) 73.15,38.07 72.54,37.47 72.54,37.41 70.87,35.73 ; U3.24 v1(41.8,64.01) ; v1(60.96,66.55) 67.44,66.55 67.87,66.12 v1(73.91,66.12)
  BOTTOM w0.305: v1(60.96,66.55) 59.18,64.77 51.65,64.77 50.99,65.43 49.6,65.43 49.09,64.92 42.71,64.92 v1(41.8,64.01) ; v1(73.91,66.12) 79.68,66.12 83.82,61.98 83.82,54.86 73.15,44.2 v1(73.15,39.37)
N05742: length 61.3
  TOP w0.305: v1(70.87,38.1) 70.87,36.8 70.36,36.3 U2.11 ; v1(64.26,64.26) 64.26,62.48 65.38,61.37 65.72,61.37 66.7,60.38 66.7,58.22 65.38,56.89 65.38,54.28 65.79,53.87 v1(65.79,52.58) ; U3.26 v1(44.34,61.47)
  BOTTOM w0.305: v1(70.87,38.1) 67.31,41.66 67.31,42.46 67.28,42.49 67.28,51.08 v1(65.79,52.58) ; v1(44.34,61.47) 46.37,63.5 48.17,63.5 49.6,62.08 50.99,62.08 52.16,63.25 63.25,63.25 v1(64.26,64.26)
N09636: length 9.9
  TOP w0.305: U3.3 16.4,47.52 17.27,47.52 J8.1
N09640: length 11.4
  TOP w0.305: J8.2 21.23,48.51 18.94,48.51 U3.5
N53390: length 9.8
  TOP w0.305: R15.3 52.32,38.47 52.32,42.67 54.51,42.67 R16.2

## Copper pours and planes (outline as drawn; the poured copper is in the pictures)
GND on TOP, BOTTOM: 2.54,73.66 99.06,73.66 99.06,2.54 2.54,2.54

## Text on the board
TOP: SatRot | Taking Everyone to Space
